# Altium PCB 恒流源三极管.pcbdoc
Units mil, origin at the board's own origin, x right, y up, seen from the top; angles counter-clockwise.
Board outline 5895 x 2877 mil, 2 copper layers (Top Layer, Bottom Layer); 32 components, 27 nets, 78 pads, 0 vias.
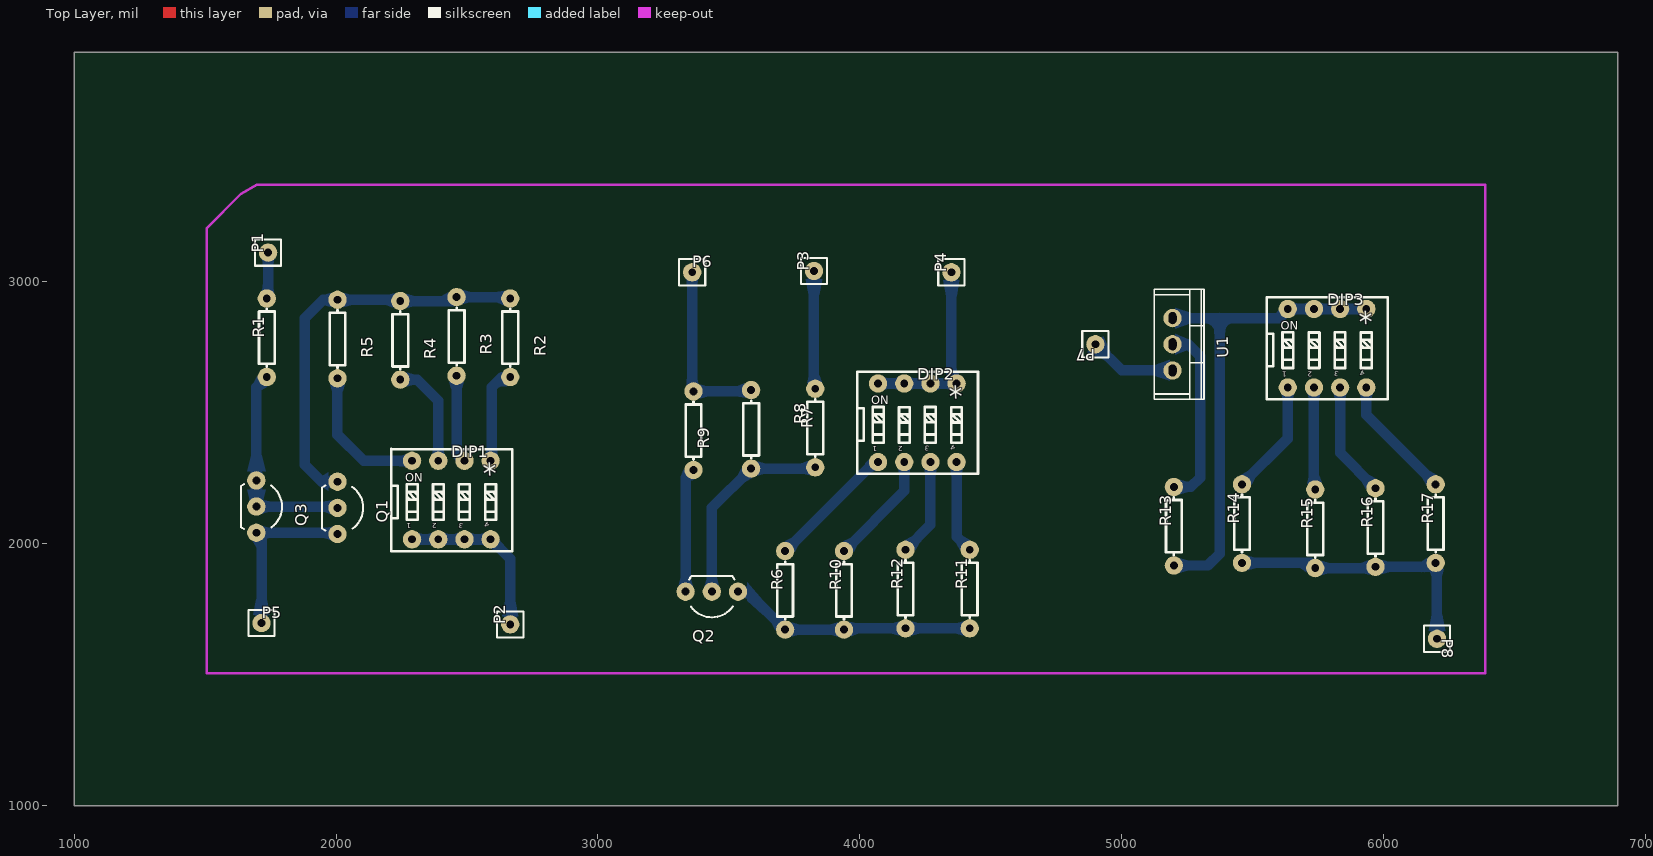
[diagram p0: Top Layer view]
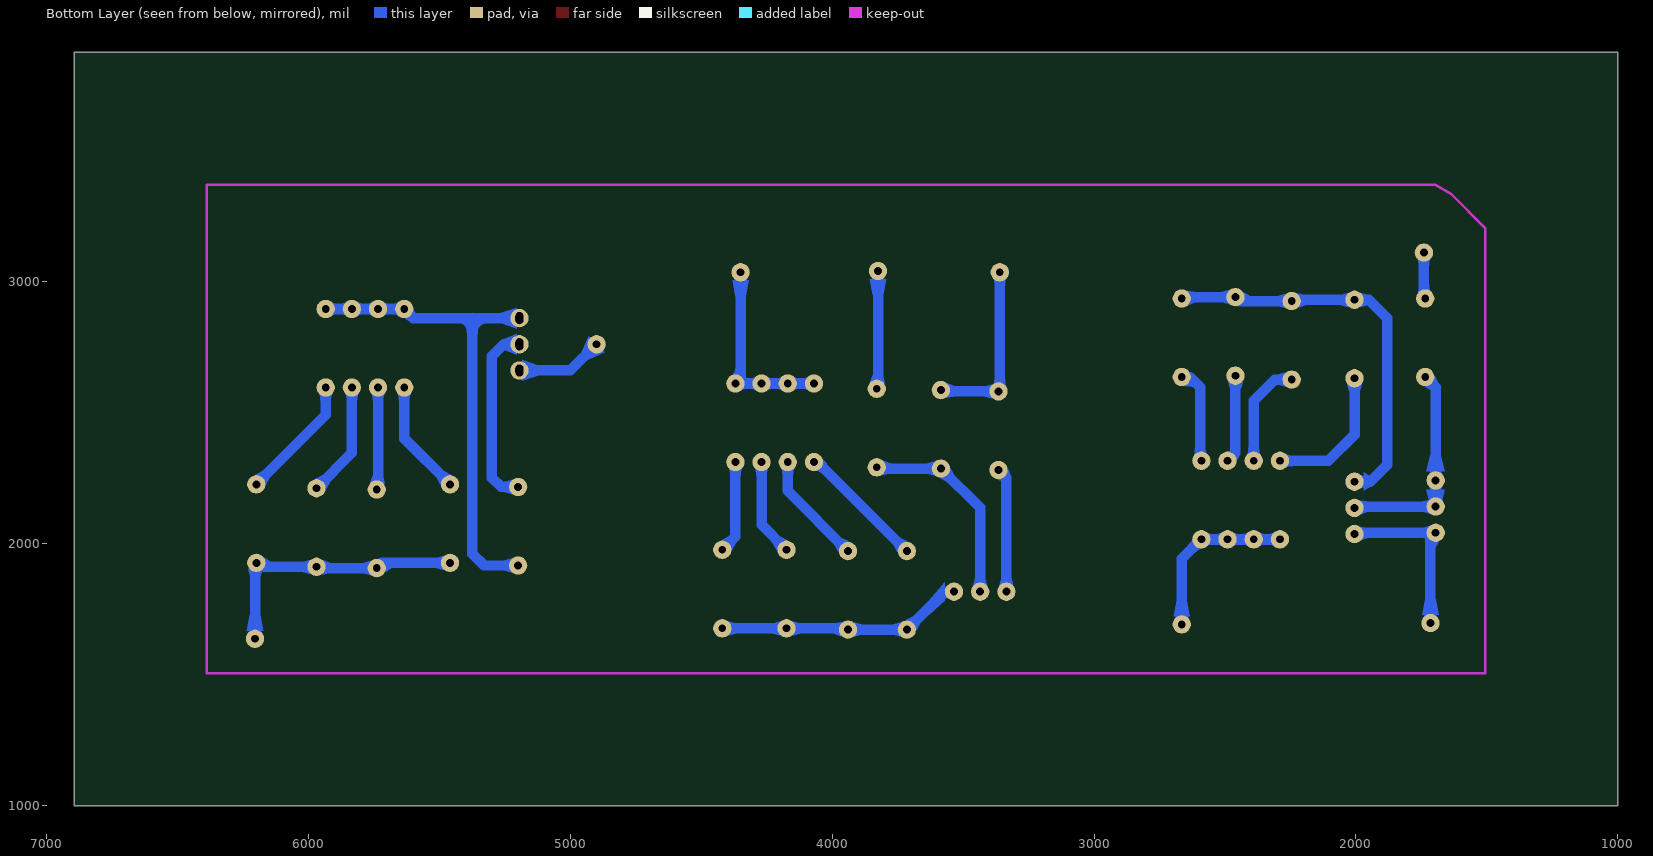
[diagram p1: Bottom Layer view, seen from below]

## Layer stack, top to bottom
Top Solder: solder mask 0.4, Solder Resist, Dk 3.5
Top Layer: signal copper 1.4
Dielectric1: dielectric 12.6, FR-4, Dk 4.8
Bottom Layer: signal copper 1.4
Bottom Solder: solder mask 0.4, Solder Resist, Dk 3.5

## Board outline
6895,1000 1000,1000 1000,3877 6895,3877

## Design rules (kind name [scope] priority, off if disabled: settings)
Clearance [All] p1: gap=10
PolygonConnect [All] p1: connectstyle=Relief reliefconductorwidth=10 reliefentries=4 polygonreliefangle="90 Angle" airgapwidth=10
RoutingVias [All] p1: holewidth=28 width=50 viastyle="Through Hole" minholewidth=28 minwidth=50 maxholewidth=28 maxwidth=50
SolderMaskExpansion [All] p1: expansion=4
Width [All] p1: maxlimit=10 minlimit=10 preferedwidth=10
30 further rules are at their usual default settings.

## Components (designator, comment, footprint, x,y, rotation, side; value= is the part's Value field where it differs from the comment)
DIP1 "VDG/S-04HG-R" VDG/S-04HG-R 2440,2167 r0 top
DIP2 "VDG/S-04HG-R" VDG/S-04HG-R 4220,2462 r0 top
DIP3 "VDG/S-04HG-R" VDG/S-04HG-R 5785,2747 r0 top
P1 "Header-Male-2.54_1x1" HDR-1X1/2.54 1740,3112 r90 top
P2 "Header-Male-2.54_1x1" HDR-1X1/2.54 2665,1692 r90 top
P3 "Header-Male-2.54_1x1" HDR-1X1/2.54 3825,3042 r90 top
P4 "Header-Male-2.54_1x1" HDR-1X1/2.54 4350,3037 r90 top
P5 "Header-Male-2.54_1x1" HDR-1X1/2.54 1715,1697 r0 top
P6 "Header-Male-2.54_1x1" HDR-1X1/2.54 3360,3037 r0 top
P7 "Header-Male-2.54_1x1" HDR-1X1/2.54 4900,2762 r180 top
P8 "Header-Male-2.54_1x1" HDR-1X1/2.54 6205,1637 r270 top
Q1 "BC547B Tube" TO-92_3PIN-L4.95-W3.94-PITCH2.54-L 2005,2137 r270 top
Q2 "BC547B Tube" TO-92_3PIN-L4.95-W3.94-PITCH2.54-L 3435,1817 r180 top
Q3 "BC547B Tube" TO-92_3PIN-L4.95-W3.94-PITCH2.54-L 1695,2142 r270 top
R1 "1k" AXIAL-0.3 1735,2787 r90 top
R2 "100" AXIAL-0.3 2665,2787 r270 top
R3 "500" AXIAL-0.3 2460,2792 r270 top
R4 "1500" AXIAL-0.3 2245,2777 r270 top
R5 "2k" AXIAL-0.3 2005,2782 r270 top
R6 "100" AXIAL-0.3 3715,1822 r90 top
R7 "500" AXIAL-0.3 3830,2442 r90 top
R8 "500" AXIAL-0.3 3585,2437 r270 top
R9 "300" AXIAL-0.3 3365,2432 r270 top
R10 "500" AXIAL-0.3 3940,1822 r90 top
R11 "2k" AXIAL-0.3 4420,1827 r90 top
R12 "1k" AXIAL-0.3 4175,1827 r90 top
R13 "250" AXIAL-0.3 5200,2067 r90 top
R14 "100" AXIAL-0.3 5460,2077 r90 top
R15 "500" AXIAL-0.3 5740,2057 r90 top
R16 "1.5k" AXIAL-0.3 5970,2062 r90 top
R17 "3k" AXIAL-0.3 6200,2077 r90 top
U1 "LM317" TO-220 5195,2762 r270 top

## Footprints (in the part's own frame and the unit in brackets; to place one, negate y for a bottom-side part, rotate by r counter-clockwise, add the part's x,y. Pads: shape width x height; smd on the part's side, far side on the other; paste and mask are expansions set on the pad)
AXIAL-0.3 [mil]
  round 70 hole 30: 1(-150,0) 2(150,0)
  silkscreen extent -110,-30 110,30
HDR-1X1/2.54 [mil]
  round 70 hole 30: 1(0,0)
  silkscreen extent -50,-50 50,50
TO-92_3PIN-L4.95-W3.94-PITCH2.54-L [mil]
  round 70 hole 30: 1(-100,0) 2(0,0) 3(100,0)
  silkscreen extent -86,-59 86,98
TO-220 [mil]
  round 70 hole 30 slot 45.2 at 0 deg: 1(-100,0) 2(0,0) 3(100,0)
  silkscreen extent -210,-70 210,120
VDG/S-04HG-R [mil]
  round 70 hole 30: 1(-150,-150) 2(-50,-150) 3(50,-150) 4(150,-150) 5(150,150) 6(50,150) 7(-50,150) 8(-150,150)
  silkscreen extent -230,-195 232,195

## Nets (pads, with @x,y where several pads share a name; then routed paths per layer and width w, separated by ;. In a path a pad name is that pad's centre, name@x,y a point inside that pad or via, vN(x,y) a via of type N, cw(c..) or ccw(c..) an arc to the next point about the centre after c; other vN are vias at no path point)
DIP1_6: DIP1.6 R3.2 | length 337.4
  Bottom Layer w40: R3.2 2460,2347 DIP1.6
DIP1_7: DIP1.7 R4.2 | length 408.1
  Bottom Layer w40: R4.2 2310,2627 2390,2547 DIP1.7
DIP1_8: DIP1.8 R5.2 | length 541.4
  Bottom Layer w40: R5.2 2005,2417 2105,2317 DIP1.8
DIP2_2: DIP2.2 R10.2 | length 435.3
  Bottom Layer w40: R10.2 4170,2202 DIP2.2
DIP2_3: DIP2.3 R12.2 | length 374.4
  Bottom Layer w40: R12.2 4270,2072 DIP2.3
DIP2_4: DIP2.4 R11.2 | length 355.7
  Bottom Layer w40: DIP2.4 4370,2027 R11.2
DIP3_1: DIP3.1 R14.2 | length 442.5
  Bottom Layer w40: R14.2 5635,2402 DIP3.1
DIP3_2: DIP3.2 R15.2 | length 392.1
  Bottom Layer w40: DIP3.2 5735,2212 R15.2
DIP3_3: DIP3.3 R16.2 | length 440.9
  Bottom Layer w40: DIP3.3 5835,2347 R16.2
DIP3_4: DIP3.4 R17.2 | length 479.8
  Bottom Layer w40: DIP3.4 5935,2492 R17.2
GND: P6.1 R8.1 R9.1 | length 679.1
  Bottom Layer w40: P6.1 3360,2587 R9.1 3580,2582 R8.1
P2_1: DIP1.1 DIP1.2 DIP1.3 DIP1.4 P2.1 | length 656.1
  Bottom Layer w40: DIP1.1 DIP1.2 DIP1.3 DIP1.4 2665,1942 P2.1
P4_1: DIP2.5 DIP2.6 DIP2.7 DIP2.8 P4.1 | length 733.3
  Bottom Layer w40: DIP2.8 DIP2.7 DIP2.6 DIP2.5 4350,2632 P4.1
Q1_1: Q1.1 R2.1 R3.1 R4.1 R5.1 | length 1536.3
  Bottom Layer w40: Q1.1 1945,2237 1880,2302 1880,2862 1950,2932 R5.1 2240,2932 R4.1 2445,2927 R3.1 2660,2942 R2.1
Q2_1: Q2.1 R6.1 R10.1 R11.1 R12.1 | length 947.1
  Bottom Layer w40: Q2.1 3570,1817 R6.1 R10.1 3945,1677 R12.1 R11.1
Q2_2: Q2.2 R7.1 R8.2 | length 779.2
  Bottom Layer w40: Q2.2 3435,2137 R8.2 3825,2287 R7.1
Q2_3: Q2.3 R9.2 | length 477.4
  Bottom Layer w40: Q2.3 3335,2252 R9.2
Q3_1: Q1.2 Q3.1 Q3.2 R1.1 | length 823.6
  Bottom Layer w40: R1.1 1695,2597 Q3.1 Q3.2 2000,2142 Q1.2
Q3_3: P5.1 Q1.3 Q3.3 | length 665.4
  Bottom Layer w40: P5.1 1715,2022 Q3.3 2000,2042 Q1.3
R1_2: P1.1 R1.2 | length 177.1
  Bottom Layer w40: R1.2 1740,2942 P1.1
R2_2: DIP1.5 R2.2 | length 368.6
  Bottom Layer w40: DIP1.5 2595,2322 2595,2597 2635,2637 R2.2
R6_2: DIP2.1 R6.2 | length 495.8
  Bottom Layer w40: R6.2 4055,2312 DIP2.1
R7_2: P3.1 R7.2 | length 452.1
  Bottom Layer w40: P3.1 3825,2597 R7.2
R14_1: P8.1 R14.1 R15.1 R16.1 R17.1 | length 1048.6
  Bottom Layer w40: R14.1 5720,1927 R15.1 5965,1907 R16.1 6185,1912 R17.1 6205,1922 P8.1
U1_1: DIP3.5 DIP3.6 DIP3.7 DIP3.8 R13.1 U1.1 | length 1899.9
  Bottom Layer w40: U1.1 5600,2862 DIP3.8 DIP3.7 DIP3.6 DIP3.5 ; R13.1 5330,1917 5375,1962 5375,2862 5426.8,2862
U1_2: R13.2 U1.2 | length 703.1
  Bottom Layer w40: U1.2 5255,2762 5300,2717 5300,2252 5265,2217 R13.2
U1_3: P7.1 U1.3 | length 336.4
  Bottom Layer w40: P7.1 5000,2662 U1.3

## Other copper
Bottom Layer:
  region net U1_1: 5205,2822 5205,2902 5265,2882 5265,2842
  region net U1_3: 5185,2622 5185,2702 5125,2682 5125,2642
  region net U1_2: 5205,2722 5205,2802 5255,2782 5255,2742
  region net R14_1: 6174,1668 6236,1668 6225,1728 6185,1728
  region net U1_3: 4931,2793 4869,2731 4928.28,2705.43 4956.57,2733.72
  region net Q3_3: 1684,1728 1746,1728 1735,1788 1695,1788
  region net P4_1: 4381,3006 4319,3006 4330,2946 4370,2946
  region net R7_2: 3856,3011 3794,3011 3805,2951 3845,2951
  region net Q2_1: 3570.43,1852.43 3570.43,1781.57 3630.43,1728.28 3630.43,1784.85
  region net P2_1: 2634,1723 2696,1723 2685,1783 2645,1783
  region net Q1_1: 1969.57,2201.57 1969.57,2272.43 1945,2257 1945,2217
  region net Q3_1: 1659.57,2277.43 1730.43,2277.43 1715,2337.43 1675,2337.43
  region net Q3_1: 1730.43,2206.57 1659.57,2206.57 1675,2146.57 1715,2146.57
  region net DIP2_4: 4383.07,1974.68 4422.32,2013.93 4398.52,2026.76 4370.24,1998.48
  region net Q2_1: 4395.53,1649.25 4395.53,1704.75 4369.63,1697 4369.63,1657
  region net DIP2_2: 3937.68,2008.93 3976.93,1969.68 3989.76,1993.48 3961.48,2021.76
  region net Q2_1: 3915.53,1644.25 3915.53,1699.75 3889.63,1692 3889.63,1652
  region net Q2_1: 3967.11,1646.82 3961.6,1702.04 3988.13,1697 3992.12,1657
  region net Q2_3: 3328.07,2284.32 3367.32,2245.07 3349.14,2237.86 3320.86,2266.14
  region net GND: 3389.47,2554.25 3389.47,2609.75 3415.37,2602 3415.37,2562
  region net Q2_2: 3548.07,2289.32 3587.32,2250.07 3563.52,2237.24 3535.24,2265.52
  region net Q2_2: 3609.47,2259.25 3609.47,2314.75 3635.37,2307 3635.37,2267
  region net GND: 3563.4,2556.96 3557.89,2612.18 3532.88,2602 3536.87,2562
  region net R7_2: 3855.18,2619.11 3799.96,2613.6 3805,2640.13 3845,2644.12
  region net Q2_2: 3808.4,2261.96 3802.89,2317.18 3777.88,2307 3781.87,2267
  region net R6_2: 3712.68,2008.93 3751.93,1969.68 3764.76,1993.48 3736.48,2021.76
  region net Q2_1: 3739.47,1644.25 3739.47,1699.75 3765.37,1692 3765.37,1652
  region net Q2_1: 3678.07,1669.68 3717.32,1708.93 3693.52,1721.76 3665.24,1693.48
  region net DIP3_4: 6163.07,2224.68 6202.32,2263.93 6178.52,2276.76 6150.24,2248.48
  region net R14_1: 6174.82,1899.89 6230.04,1905.4 6225,1878.87 6185,1874.88
  region net R14_1: 6184.9,1893.22 6168.37,1946.2 6145.67,1932 6158.15,1892
  region net DIP3_3: 5933.07,2209.68 5972.32,2248.93 5948.52,2261.76 5920.24,2233.48
  region net R14_1: 5994.47,1884.25 5994.47,1939.75 6020.37,1932 6020.37,1892
  region net R14_1: 5948.4,1881.96 5942.89,1937.18 5917.88,1927 5921.87,1887
  region net DIP3_2: 5765.18,2234.11 5709.96,2228.6 5715,2255.13 5755,2259.12
  region net R14_1: 5764.47,1879.25 5764.47,1934.75 5790.37,1927 5790.37,1887
  region net R14_1: 5728.56,1942.19 5706.52,1891.25 5685.12,1907 5702.42,1947
  region net DIP3_1: 5457.68,2263.93 5496.93,2224.68 5509.76,2248.48 5481.48,2276.76
  region net R14_1: 5484.47,1899.25 5484.47,1954.75 5510.37,1947 5510.37,1907
  region net U1_1: 5655.83,2873.38 5655.83,2920.62 5677.88,2917 5677.88,2877
  region net U1_1: 5603.57,2898.97 5636.97,2865.57 5618.82,2852.54 5590.54,2880.82
  region net U1_1: 5755.83,2873.38 5755.83,2920.62 5777.88,2917 5777.88,2877
  region net U1_1: 5714.17,2873.38 5714.17,2920.62 5692.12,2917 5692.12,2877
  region net U1_1: 5855.83,2873.38 5855.83,2920.62 5877.88,2917 5877.88,2877
  region net U1_1: 5814.17,2873.38 5814.17,2920.62 5792.12,2917 5792.12,2877
  region net U1_1: 5914.17,2873.38 5914.17,2920.62 5892.12,2917 5892.12,2877
  region net DIP3_4: 5958.62,2576.17 5911.38,2576.17 5915,2554.12 5955,2554.12
  region net DIP3_3: 5858.62,2576.17 5811.38,2576.17 5815,2554.12 5855,2554.12
  region net DIP3_2: 5758.62,2576.17 5711.38,2576.17 5715,2554.12 5755,2554.12
  region net DIP3_1: 5658.62,2576.17 5611.38,2576.17 5615,2554.12 5655,2554.12
  region net U1_2: 5224.47,2189.25 5224.47,2244.75 5250.37,2237 5250.37,2197
  region net U1_1: 5224.47,1889.25 5224.47,1944.75 5250.37,1937 5250.37,1897
  region net DIP2_3: 4172.68,2013.93 4211.93,1974.68 4224.76,1998.48 4196.48,2026.76
  region net Q2_1: 4150.53,1649.25 4150.53,1704.75 4124.63,1697 4124.63,1657
  region net Q2_1: 4199.47,1649.25 4199.47,1704.75 4225.37,1697 4225.37,1657
  region net P4_1: 4090.83,2588.38 4090.83,2635.62 4112.88,2632 4112.88,2592
  region net P4_1: 4149.17,2588.38 4149.17,2635.62 4127.12,2632 4127.12,2592
  region net P4_1: 4190.83,2588.38 4190.83,2635.62 4212.88,2632 4212.88,2592
  region net P4_1: 4249.17,2588.38 4249.17,2635.62 4227.12,2632 4227.12,2592
  region net P4_1: 4290.83,2588.38 4290.83,2635.62 4312.88,2632 4312.88,2592
  region net P4_1: 4349.17,2588.38 4349.17,2635.62 4327.12,2632 4327.12,2592
  region net P4_1: 4381.18,2641.45 4339.39,2619.41 4330,2639.38 4370,2660.48
  region net DIP2_4: 4393.62,2291.17 4346.38,2291.17 4350,2269.12 4390,2269.12
  region net DIP2_3: 4293.62,2291.17 4246.38,2291.17 4250,2269.12 4290,2269.12
  region net DIP2_2: 4193.62,2291.17 4146.38,2291.17 4150,2269.12 4190,2269.12
  region net R6_2: 4064.14,2281.05 4040.03,2321.69 4022.59,2307.87 4043.65,2272.37
  region net Q2_3: 3361.57,1840.44 3308.43,1840.44 3315,1865.24 3355,1865.24
  region net Q2_2: 3461.57,1840.44 3408.43,1840.44 3415,1865.24 3455,1865.24
  region net DIP1_8: 2032.75,2607.53 1977.25,2607.53 1985,2581.63 2025,2581.63
  region net Q1_1: 1980.53,2904.25 1980.53,2959.75 1954.63,2952 1954.63,2912
  region net Q1_1: 2029.47,2904.25 2029.47,2959.75 2055.37,2952 2055.37,2912
  region net DIP1_7: 2269.47,2599.25 2269.47,2654.75 2295.37,2647 2295.37,2607
  region net Q1_1: 2223.4,2957.04 2217.89,2901.82 2192.88,2912 2196.87,2952
  region net Q1_1: 2269.47,2899.25 2269.47,2954.75 2295.37,2947 2295.37,2907
  region net DIP1_6: 2487.75,2617.53 2432.25,2617.53 2440,2591.63 2480,2591.63
  region net Q1_1: 2444.9,2908.22 2428.37,2961.2 2405.67,2947 2418.15,2907
  region net Q1_1: 2484.47,2914.25 2484.47,2969.75 2510.37,2962 2510.37,2922
  region net DIP1_8: 2269.17,2293.38 2269.17,2340.62 2247.12,2337 2247.12,2297
  region net DIP1_7: 2413.62,2337.83 2366.38,2337.83 2370,2359.88 2410,2359.88
  region net DIP1_6: 2458.57,2315.03 2491.97,2348.43 2474.14,2361.14 2445.86,2332.86
  region net R2_2: 2568.97,2340.45 2615.89,2334.94 2615,2357.24 2575,2361.94
  region net P2_1: 2569.17,1993.38 2569.17,2040.62 2547.12,2037 2547.12,1997
  region net P2_1: 2588.03,1985.57 2621.43,2018.97 2634.46,2000.82 2606.18,1972.54
  region net P2_1: 2510.83,1993.38 2510.83,2040.62 2532.88,2037 2532.88,1997
  region net P2_1: 2469.17,1993.38 2469.17,2040.62 2447.12,2037 2447.12,1997
  region net P2_1: 2410.83,1993.38 2410.83,2040.62 2432.88,2037 2432.88,1997
  region net P2_1: 2369.17,1993.38 2369.17,2040.62 2347.12,2037 2347.12,1997
  region net P2_1: 2310.83,1993.38 2310.83,2040.62 2332.88,2037 2332.88,1997
  region net R2_2: 2651.55,2602.53 2632.48,2654.65 2610.12,2640.4 2625.27,2598.98
  region net Q1_1: 2643.4,2967.04 2637.89,2911.82 2612.88,2922 2616.87,2962
  region net Q3_1: 1698.07,2639.32 1737.32,2600.07 1713.52,2587.24 1685.24,2615.52
  region net Q3_3: 1984.44,2065.86 1978.94,2013 1954.94,2022 1959.1,2062
  region net Q3_1: 1984.44,2165.86 1978.94,2113 1954.94,2122 1959.1,2162
  region net Q3_3: 1718.44,2015.43 1718.44,2068.57 1743.24,2062 1743.24,2022
  region net Q3_3: 1728.9,2031.69 1680.53,2009.65 1695,1988.99 1735,2007.21
  region net Q3_1: 1721.57,2165.44 1668.43,2165.44 1675,2190.24 1715,2190.24
  region net Q3_1: 1718.44,2115.43 1718.44,2168.57 1743.24,2162 1743.24,2122

## Silkscreen, mask and mechanical layers (free items; w line width, h text height)
Document:
  lines w0.1: 3946.5,2437.5 3948.5,2439.5

## Text inside footprints (layer, text, board x,y; h text height)
DIP1: Top Overlay "4" at 2588.12,2076.05 h19.68 r148; Top Overlay "3" at 2486.98,2077.16 h19.68 r169; Top Overlay "*" at 2650.32,2291.8 h80 r122; Top Overlay "2" at 2384.17,2077.84 h19.68 r179; Top Overlay "1" at 2286.2,2077.64 h19.68 r180; Top Overlay "ON" at 2264,2237.25 h31.5
DIP2: Top Overlay "4" at 4368.12,2371.05 h19.68 r148; Top Overlay "3" at 4266.98,2372.16 h19.68 r169; Top Overlay "*" at 4430.32,2586.8 h80 r122; Top Overlay "2" at 4164.17,2372.84 h19.68 r179; Top Overlay "1" at 4066.2,2372.64 h19.68 r180; Top Overlay "ON" at 4044,2532.25 h31.5
DIP3: Top Overlay "4" at 5933.12,2656.05 h19.68 r148; Top Overlay "3" at 5831.98,2657.16 h19.68 r169; Top Overlay "*" at 5995.32,2871.8 h80 r122; Top Overlay "2" at 5729.17,2657.84 h19.68 r179; Top Overlay "1" at 5631.2,2657.64 h19.68 r180; Top Overlay "ON" at 5609,2817.25 h31.5